# Altium PCB tanker.PcbDoc
Units mm, origin at the board's own origin, x right, y up, seen from the top; angles counter-clockwise.
Board outline 20 x 71.05 mm, 2 copper layers (Top Layer, Bottom Layer); 23 components, 16 nets, 61 pads, 7 vias.
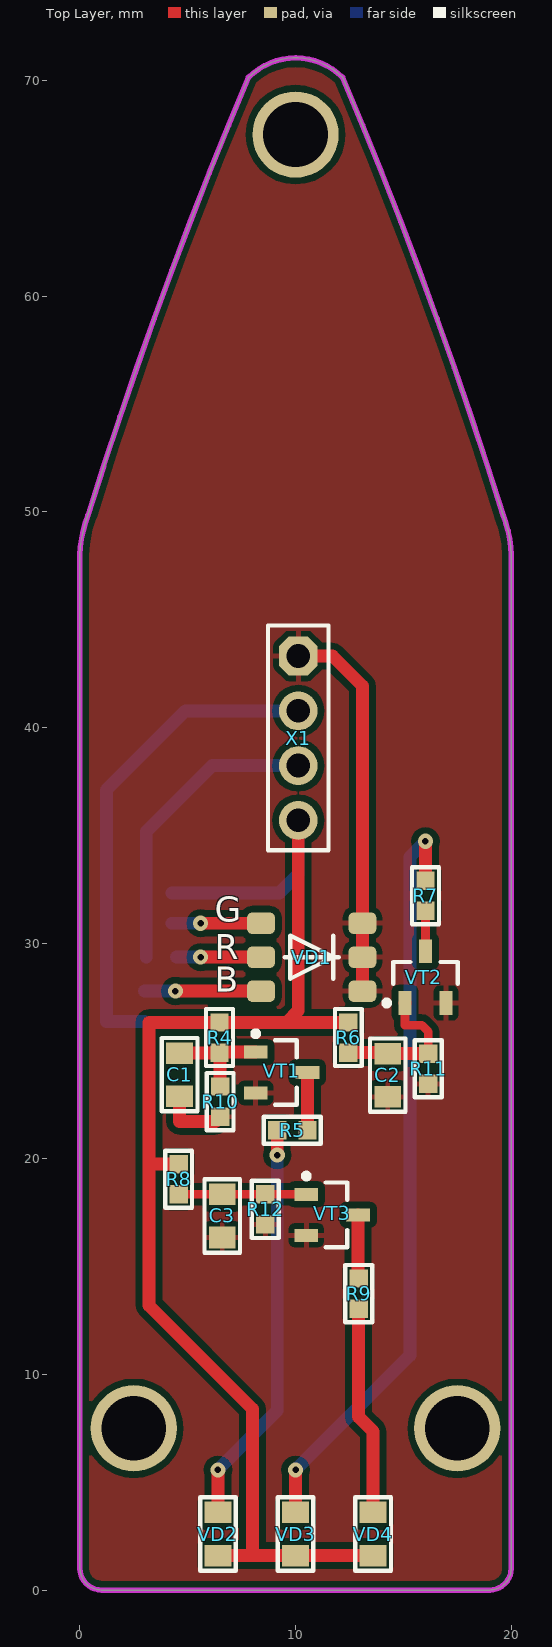
[diagram p0: Top Layer view]
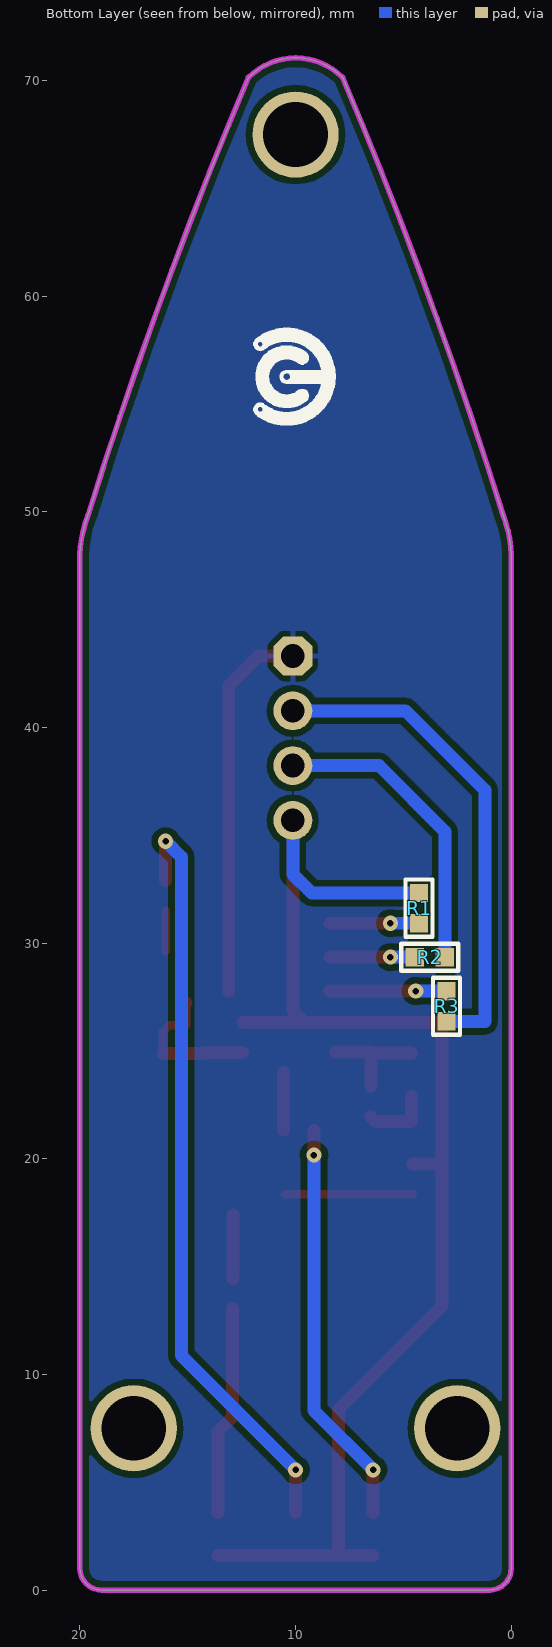
[diagram p1: Bottom Layer view, seen from below]
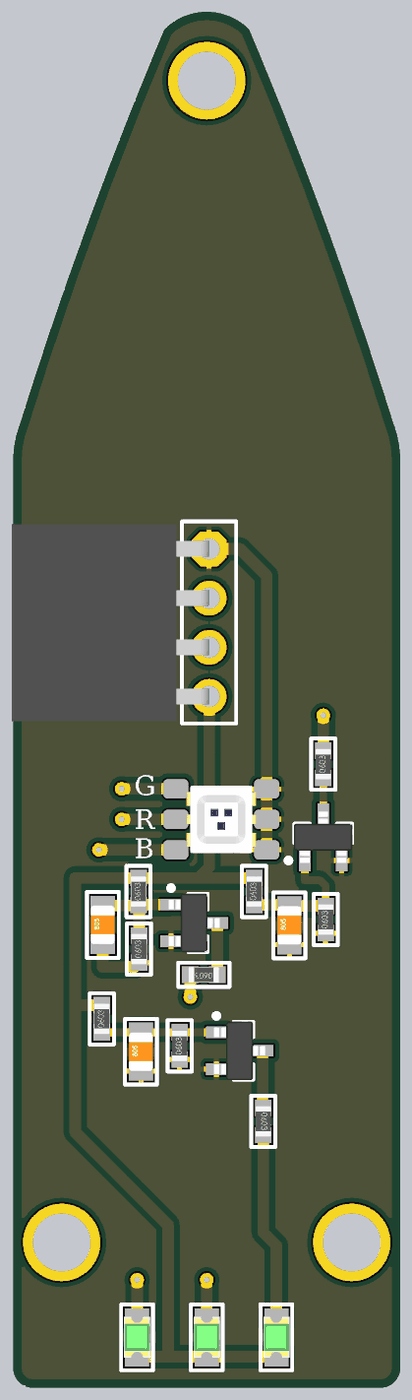
[diagram p2: 3D render of the assembled board from above, using the file's embedded part models]
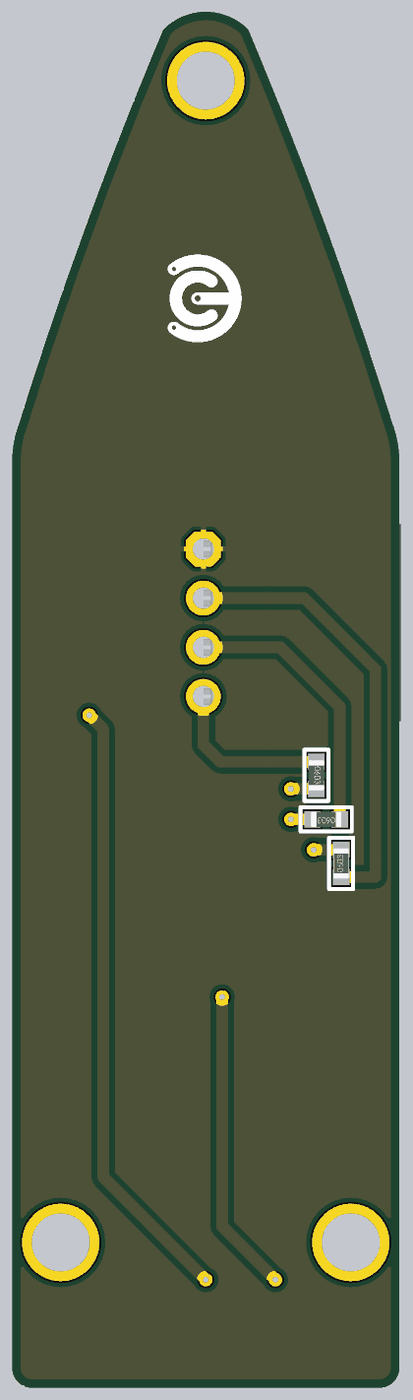
[diagram p3: 3D render of the assembled board from below, using the file's embedded part models]

## Layer stack, top to bottom
Top Solder: solder mask 0.0102, Solder Resist, Dk 3.5
Top Layer: signal copper 0.0356
Dielectric 1: dielectric 0.32, FR-4, Dk 4.8
Bottom Layer: signal copper 0.0356
Bottom Solder: solder mask 0.0102, Solder Resist, Dk 3.5

## Board outline
1,0 cw(c1,1) 0,1 0,48 cw(c5.541,47.84) 0.369,49.835 cw(c213.533,-16.785) 7.816,70.149 cw(c10,67.964) 12.184,70.149 cw(c-193.533,-16.785) 19.631,49.835 cw(c14.459,47.84) 20,48 20,1 cw(c19,1) 19,0

## Design rules (kind name [scope] priority, off if disabled: settings)
Clearance [All] p1: gap=0.3 ignorepadtopadclearanceinfootprint=FALSE
PolygonConnect [All] p1: connectstyle=Relief reliefconductorwidth=0.254 reliefentries=4 polygonreliefangle="90 Angle" airgapwidth=0.254
RoutingVias [All] p1: holewidth=0.711 width=1.27 viastyle="Through Hole" minholewidth=0.1 minwidth=0.3 maxholewidth=1 maxwidth=1.27
SolderMaskExpansion [All] p1: expansion=0.102
Width [All] p1: maxlimit=10 minlimit=0.254 preferedwidth=0.254 minimp=50.000000 maximp=50.000000 favimp=50.000000
30 further rules are at their usual default settings.

## Components (designator, comment, footprint, x,y, rotation, side; value= is the part's Value field where it differs from the comment)
C1 "Ceramic capacitor, 0.1μF, X7R, ±10%, 16V, 0805, -55...+125°C" "CAP: 0805" 4.625,23.9 r90 top value=0.1?F
C2 "Ceramic capacitor, 0.1μF, X7R, ±10%, 16V, 0805, -55...+125°C" "CAP: 0805" 14.275,23.875 r90 top value=0.1?F
C3 "Ceramic capacitor, 0.1μF, X7R, ±10%, 16V, 0805, -55...+125°C" "CAP: 0805" 6.6,17.35 r90 top value=0.1?F
R1 "Resistor film, 100R, ±5%, 0603, 0.1W, -55...+125°C" "RES: 0603" 4.275,31.625 r270 bottom value=100R
R2 "Resistor film, 100R, ±5%, 0603, 0.1W, -55...+125°C" "RES: 0603" 3.775,29.35 r0 bottom value=100R
R3 "Resistor film, 100R, ±5%, 0603, 0.1W, -55...+125°C" "RES: 0603" 3,27.075 r90 bottom value=100R
R4 "Resistor film, 100R, ±5%, 0603, 0.1W, -55...+125°C" "RES: 0603" 6.475,25.625 r90 top value=100R
R5 "Resistor film, 100R, ±5%, 0603, 0.1W, -55...+125°C" "RES: 0603" 9.85,21.325 r180 top value=100R
R6 "Resistor film, 100R, ±5%, 0603, 0.1W, -55...+125°C" "RES: 0603" 12.45,25.625 r90 top value=100R
R7 "Resistor film, 100R, ±5%, 0603, 0.1W, -55...+125°C" "RES: 0603" 16.025,32.2 r90 top value=100R
R8 "Resistor film, 100R, ±5%, 0603, 0.1W, -55...+125°C" "RES: 0603" 4.575,19.05 r90 top value=100R
R9 "Resistor film, 100R, ±5%, 0603, 0.1W, -55...+125°C" "RES: 0603" 12.925,13.75 r270 top value=100R
R10 "Resistor film, 100R, ±5%, 0603, 0.1W, -55...+125°C" "RES: 0603" 6.5,22.65 r90 top value=100R
R11 "Resistor film, 100R, ±5%, 0603, 0.1W, -55...+125°C" "RES: 0603" 16.15,24.175 r90 top value=100R
R12 "Resistor film, 100R, ±5%, 0603, 0.1W, -55...+125°C" "RES: 0603" 8.6,17.65 r90 top value=100R
VD1 "VD?" RGB 10.75,29.35 r0 top
VD2 "LED, *, *, *, -55...+150°C" "LED: 0805G" 6.4,2.6 r90 top
VD3 "LED, *, *, *, -55...+150°C" "LED: 0805G" 10,2.6 r90 top
VD4 "LED, *, *, *, -55...+150°C" "LED: 0805G" 13.6,2.6 r90 top
VT1 "MOSFET N-channel transistor, 80V, 7A, 9.1nC, 2.5W, 34mOhm, 756pF, 8-TDSON, -55...+150°C" SOT23 9.35,24 r0 top
VT2 "MOSFET N-channel transistor, 80V, 7A, 9.1nC, 2.5W, 34mOhm, 756pF, 8-TDSON, -55...+150°C" SOT23 16.025,28.425 r90 top
VT3 "MOSFET N-channel transistor, 80V, 7A, 9.1nC, 2.5W, 34mOhm, 756pF, 8-TDSON, -55...+150°C" SOT23 11.7,17.4 r0 top
X1 "Connector, 4pin, 2.54mm, 500VAC, 3A" "CON: PBS-4 R" 10.125,39.505 r270 top

## Footprints (in the part's own frame and the unit in brackets; to place one, negate y for a bottom-side part, rotate by r counter-clockwise, add the part's x,y. Pads: shape width x height; smd on the part's side, far side on the other; paste and mask are expansions set on the pad)
"CAP: 0805" [mm]
  rect 1x1.25 smd: 1(-1,0) 2(1,0)
  silkscreen extent -1.7,-0.82 1.7,0.82, body extent -1,-0.62 1,0.63, height 0.78
"CON: PBS-4 R" [mm] "PBS-5"
  oct 1.8x1.8 hole 1.1: 1(-3.81,0)
  round 1.8 hole 1.1: 2(-1.27,0) 3(1.27,0) 4(3.81,0)
  silkscreen extent -5.23,-1.4 5.2,1.4, body extent -5.08,-10.2 5.08,0, height 2.54
"LED: 0805G" [mm]
  rect 1x1.25 smd: 1(-1,0) 2(1,0)
  silkscreen extent -1.7,-0.82 1.7,0.82, body extent -1.05,-0.67 1.05,0.68, height 0.9
"RES: 0603" [mm]
  rect 0.85x0.85 smd: 1(-0.7,0) 2(0.7,0)
  silkscreen extent -1.33,-0.63 1.33,0.63, body extent -0.8,-0.4 0.8,0.4, height 0.44
RGB [mm]
  rrect50% 1.3x1 smd: 1(2.35,1.575) 2(2.35,0) 3(2.35,-1.575) 4(-2.35,1.575) 5(-2.35,0) 6(-2.35,-1.575)
  silkscreen extent -1.25,-1 1.25,1, body extent -1.8,-1.75 1.8,1.75, height 2.01
SOT23 [mm]
  rect 1.1x0.6 smd: 1(-1.2,0.95) 2(-1.2,-0.95) 3(1.2,0)
  round 0.5 on Mech1: ""(-0.9,1.1)
  silkscreen extent -1.32,-1.5 0.7,1.92, body extent -1.32,-1.52 1.32,1.52, height 1.12

## Part data
C1 C2 C3: library part Ceramic_0805, Manufacturer=Yageo, Package=0805, PartNumber=CC0805KRX7R7BB104, Temperature=-55...+125°C, Tolerance=±10%, TypeCapacitor="Ceramic capacitor", TypeDielectric=X7R, ValueManufacturerPartNumber="Ceramic capacitor, 0.1?F, X7R, ±10%, 16V, 0805, -55...+125°C", Voltage=16V, HelpURL=https://www.digikey.com/product-detail/en/yageo/CC0805KRX7R7BB104/311-1142-1-ND/303052
R1 R2 R3 R4 R5 R6 R7 R8 R9 R10 R11 R12: library part Resistor_0603, Manufacturer=Yageo, Package=0603, PartNumber=RC0603JR-07100RL, Power=0.1W, Temperature=-55...+125°C, Tolerance=±5%, TypeResistor="Resistor film", HelpURL=https://www.digikey.com/product-detail/en/yageo/RC0603JR-07100RL/311-100GRCT-ND/729644, ValueManufacturerPartNumber="Resistor film, 100R, ±5%, 0603, 0.1W, -55...+125°C"
VD1: library part RGB
VD2 VD3 VD4: library part LED_single, Color=GREEN, Temperature=-55...+150°C, TypeDiode=LED, ValueManufacturerPartNumber="LED, *, *, *, -55...+150°C"
VT1 VT2 VT3: library part MOSFET_N_132, CurrentDS=7A, InputCapacitor=756pF, Manufacturer="Infineon Technologies", MaxPower=2.5W, Package=8-TDSON, PartNumber=BSC340N08NS3GATMA1, Temperature=-55...+150°C, VoltageDS=80V, GateCharge=9.1nC, HelpURL=https://www.digikey.com/product-detail/en/infineon-technologies/BSC340N08NS3GATMA1/BSC340N08NS3GATMA1TR-ND/2080655, RDS=34mOhm, TypeTransistor="MOSFET N-channel transistor", ValueManufacturerPartNumber="MOSFET N-channel transistor, 80V, 7A, 9.1nC, 2.5W, 34mOhm, 756pF, 8-TDSON, -55...+150°C"
X1: library part PBS-4, CurrentMax=3A, Manufacturer=Connfly, VoltageMax=500VAC, CommentText="\"Ðàçúåì\"", HelpURL=https://www.chipdip.ru/product/pbs-4, Multichannel=4pin, PartNumber=PBS-4, Pitch=2.54mm, TypeConnector=Connector, ValueManufacturerPartNumber="Connector, 4pin, 2.54mm, 500VAC, 3A"

## Free pads (board coordinates)
  round 4 hole 3: ""(2.5,7.5) ""(10,67.5) ""(17.5,7.5)

## Via types
v1: diameter 0.7, hole 0.3, Top Layer to Bottom Layer, 7 vias

## Nets (pads, with @x,y where several pads share a name; then routed paths per layer and width w, separated by ;. In a path a pad name is that pad's centre, name@x,y a point inside that pad or via, vN(x,y) a via of type N, cw(c..) or ccw(c..) an arc to the next point about the centre after c; other vN are vias at no path point)
GND: C1.1 C2.1 C3.1 R10.1 R11.1 R12.1 VD1.1 VD1.2 VD1.3 VT1.2 VT2.2 VT3.2 X1.1 | length 20.8
  Top Layer w0.6: C1.1 4.625,21.725 6.275,21.725 R10.1 ; X1.1 11.71,43.315 13.1,41.925 VD1.1 VD1.2 VD1.3
NetC1_2: C1.2 R4.1 R10.2 VT1.1 | length 5.1
  Top Layer w0.6: C1.2 6.45,24.9 R4.1 ; R10.2 6.5,24.9 R4.1 ; VT1.1 6.5,24.95 R4.1
NetC2_2: C2.2 R6.1 R11.2 VT2.1 | length 7
  Top Layer w0.4: VT2.1 15.075,26.2 15.85,26.2 16.15,25.9 R11.2
  Top Layer w0.6: R6.1 14.225,24.925 C2.2 R11.2
NetC3_2: C3.2 R8.1 R12.2 VT3.1 | length 5.9
  Top Layer w0.4: R8.1 C3.2 R12.2 VT3.1
NetR1_1: R1.1 R4.2 R6.2 R8.2 VD2.1 VD3.1 VD4.1 X1.4 | length 62.9
  Top Layer w0.6: R8.2 3.25,19.75 3.2,19.8 ; VD2.1 7.85,1.6 ; X1.4 10.125,26.875 9.575,26.325 ; R6.2 9.575,26.325 ; VD4.1 VD3.1 7.85,1.6 ; 3.2,19.8 3.2,13.2 8,8.4 8,1.75 7.85,1.6 ; 3.2,19.8 3.2,26.325 R4.2 9.575,26.325
  Bottom Layer w0.6: R1.1 9.25,32.325 10.125,33.2 X1.4
NetR1_2: R1.2 VD1.4 | length 4.1
  Top Layer w0.6: v1(5.6,30.925) VD1.4
  Bottom Layer w0.6: R1.2 v1(5.6,30.925)
NetR2_1: R2.1 X1.3 | length 14.1
  Bottom Layer w0.6: R2.1 3.075,35.175 6.135,38.235 X1.3
NetR2_2: R2.2 VD1.5 | length 3.9
  Top Layer w0.6: v1(5.6,29.35) VD1.5
  Bottom Layer w0.6: R2.2 v1(5.6,29.35)
NetR3_1: R3.1 X1.2 | length 22.9
  Bottom Layer w0.6: R3.1 1.225,26.375 1.225,37.1 4.9,40.775 X1.2
NetR3_2: R3.2 VD1.6 | length 5.4
  Top Layer w0.6: v1(4.425,27.775) VD1.6
  Bottom Layer w0.6: R3.2 v1(4.425,27.775)
NetR5_1: R5.1 VT1.3 | length 2.7
  Top Layer w0.6: R5.1 VT1.3
NetR5_2: R5.2 VD2.2 | length 18.9
  Top Layer w0.6: VD2.2 v1(6.4,5.575) ; v1(9.15,20.175) R5.2
  Bottom Layer w0.6: v1(6.4,5.575) 9.15,8.325 v1(9.15,20.175)
NetR7_1: R7.1 VT2.3 | length 1.9
  Top Layer w0.4: VT2.3 R7.1
NetR7_2: R7.2 VD3.2 | length 35.4
  Top Layer w0.6: VD3.2 v1(10,5.575) ; R7.2 v1(16.025,34.725)
  Bottom Layer w0.6: v1(10,5.575) 15.3,10.875 15.3,34 v1(16.025,34.725)
NetR9_1: R9.1 VT3.3 | length 3
  Top Layer w0.6: VT3.3 12.9,14.475 R9.1
NetR9_2: R9.2 VD4.2 | length 9.7
  Top Layer w0.6: R9.2 12.925,8.025 13.6,7.35 VD4.2
pads on no net: VT1. VT2. VT3.

## Polygon pours and split planes (outlines as drawn)
GND on Bottom Layer "Top Layer-No Net1" (solid, pour order 1): 1,0 cw(c1,1) 0,1 0,48 cw(c5.541,47.84) 0.369,49.835 cw(c213.533,-16.785) 7.816,70.149 cw(c10,67.964) 12.184,70.149 cw(c-193.533,-16.785) 19.631,49.835 cw(c14.459,47.84) 20,48 20,1 cw(c19,1) 19,0
GND on Top Layer "Top Layer-No Net" (solid, pour order 0): 1,0 cw(c1,1) 0,1 0,48 cw(c5.541,47.84) 0.369,49.835 cw(c213.533,-16.785) 7.816,70.149 cw(c10,67.964) 12.184,70.149 cw(c-193.533,-16.785) 19.631,49.835 cw(c14.459,47.84) 20,48 20,1 cw(c19,1) 19,0

## Keep-outs
Keep-Out Layer:
  the board outline again, w0.254

## Silkscreen, mask and mechanical layers (free items; w line width, h text height)
Bottom Overlay:
  drawing of 376 lines, arcs and shapes, not listed

## Text inside footprints (layer, text, board x,y; h text height)
VD1: Top Overlay "G" at 6.25,30.6 h2; Top Overlay "R" at 6.25,28.85 h2; Top Overlay "B" at 6.25,27.35 h2